# EAGLE board template (EAGLE 7.7.0)

Size 68.58 x 68.58 mm. Coordinates in mm from the lower left corner, seen from the top.
Outline: circle at 34.29,34.29 radius 34.29
Copper layers (1*16): Top 0.035mm / dielectric 1.5mm / Bottom 0.035mm
Design rules "default": minimum track width 10mil, minimum drill 0.6mm, track to track 8mil, track to pad 8mil, pad to pad 8mil, via to via 8mil, smd to smd 8mil, copper to edge 40mil, drill to drill 8mil, minimum pad ring 10mil, minimum via ring 8mil, stop-mask expansion 4mil, vias tented up to drill 0mil, thermal gap 10mil

## Footprints (pad centres in the part's own frame; a part is rotated, then mirrored left to right if it is on the bottom)
STAND-OFF-TIGHT = hole 3.048: 0,0

## Placement (x,y rotation side)
E$1  [STAND-OFF-TIGHT]  56.52,34.29 0 top
E$2  [STAND-OFF-TIGHT]  34.29,56.52 0 top
E$3  [STAND-OFF-TIGHT]  34.29,12.06 0 top
E$5  [STAND-OFF-TIGHT]  12.06,34.29 0 top

## Library data of the parts
E$1-E$3 E$5 = SparkFun-Hardware